# Altium PCB MAIN.PcbDoc
Units mil, origin at the board's own origin, x right, y up, seen from the top; angles counter-clockwise.
Board outline 1965 x 2031 mil, 4 copper layers (SIG1, GND, PWR, SIG2), stack 53.912 mil thick; 19 components, 15 nets, 78 pads, 16 vias.
Unrouted connection lines stored in the file: 1.
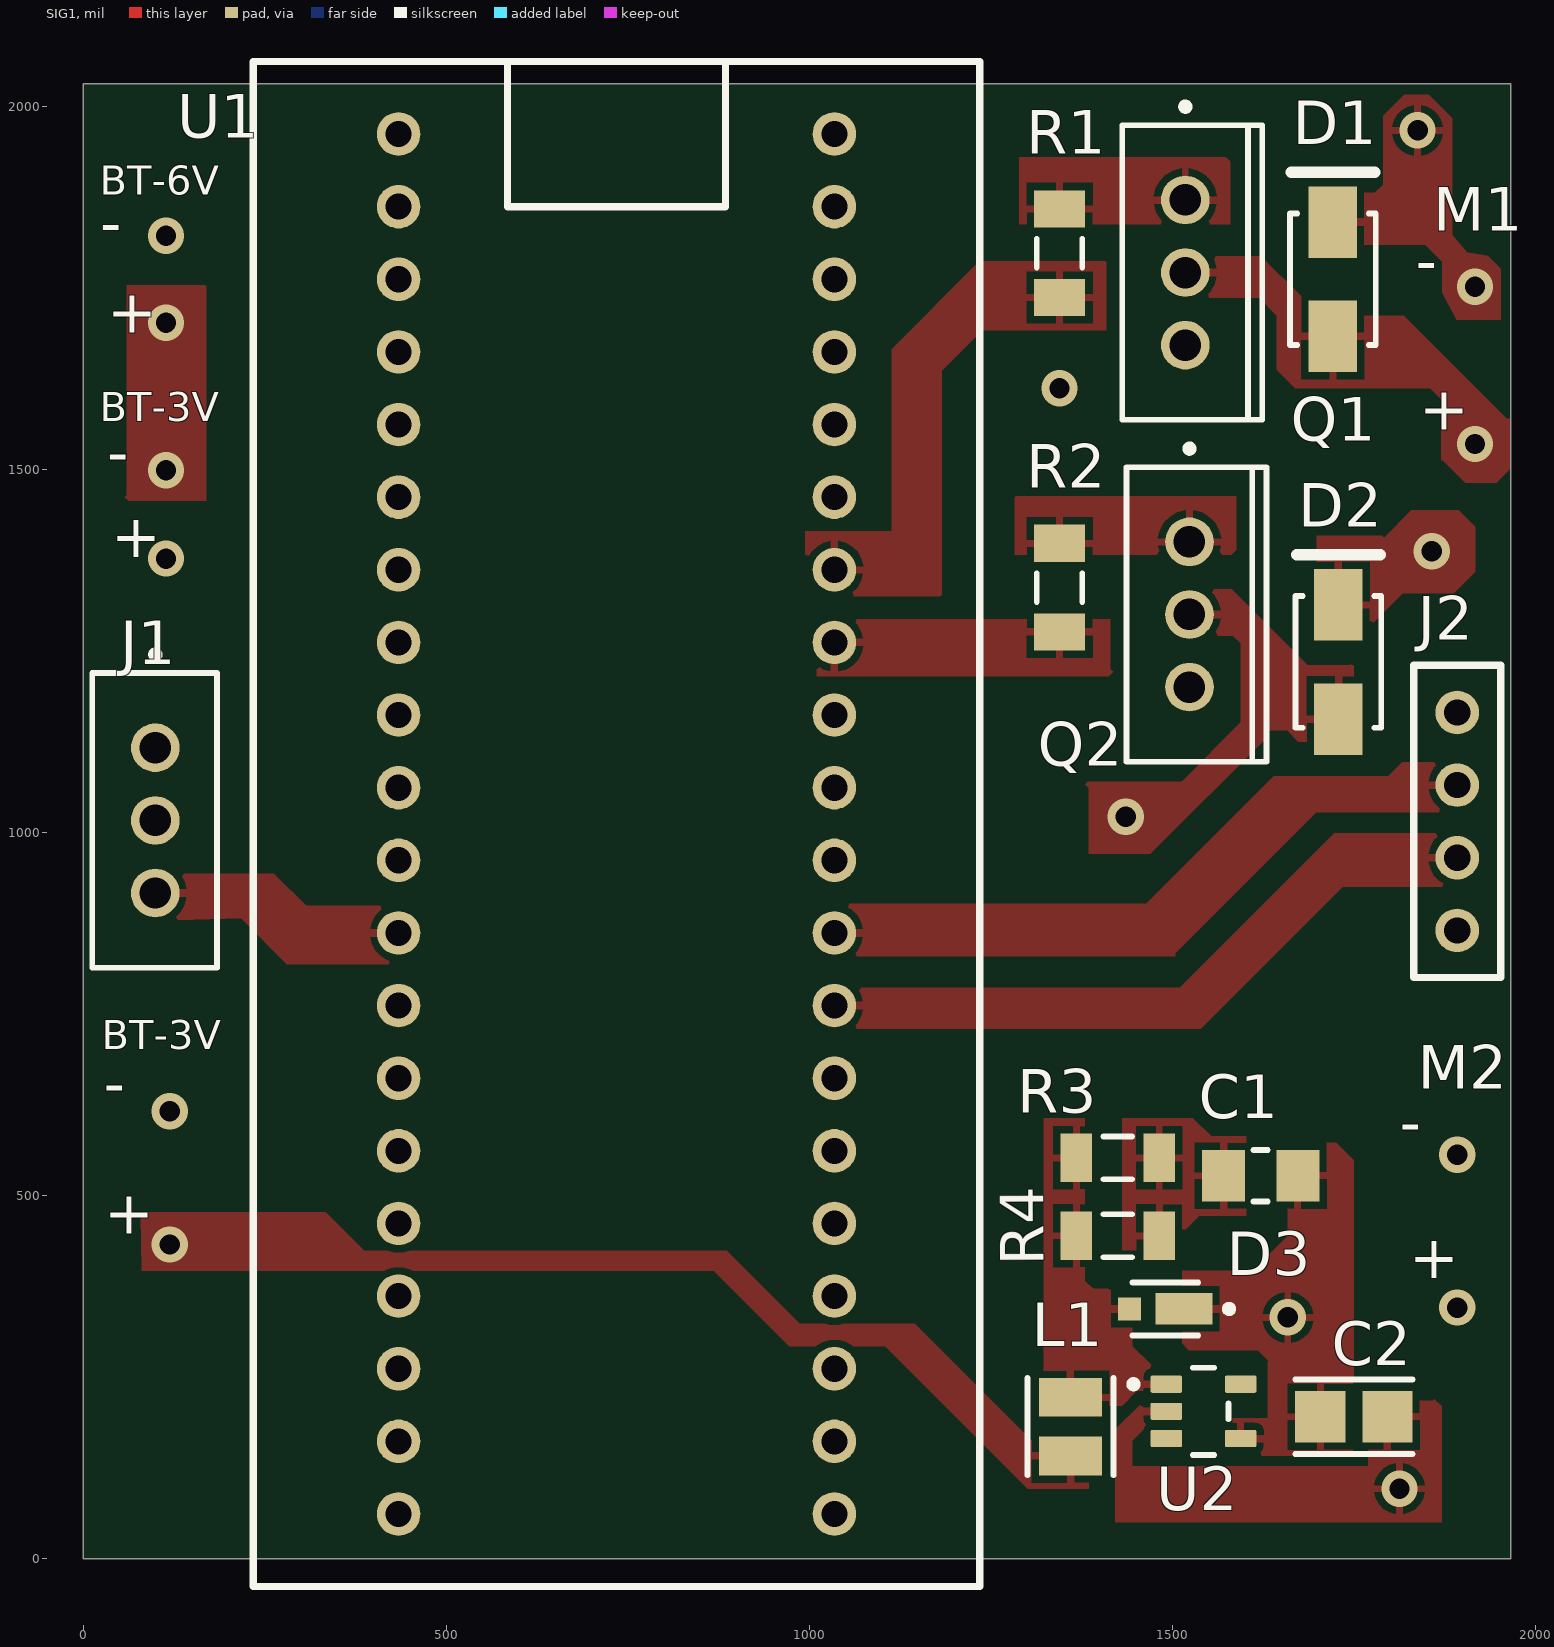
[diagram p0: SIG1 view]
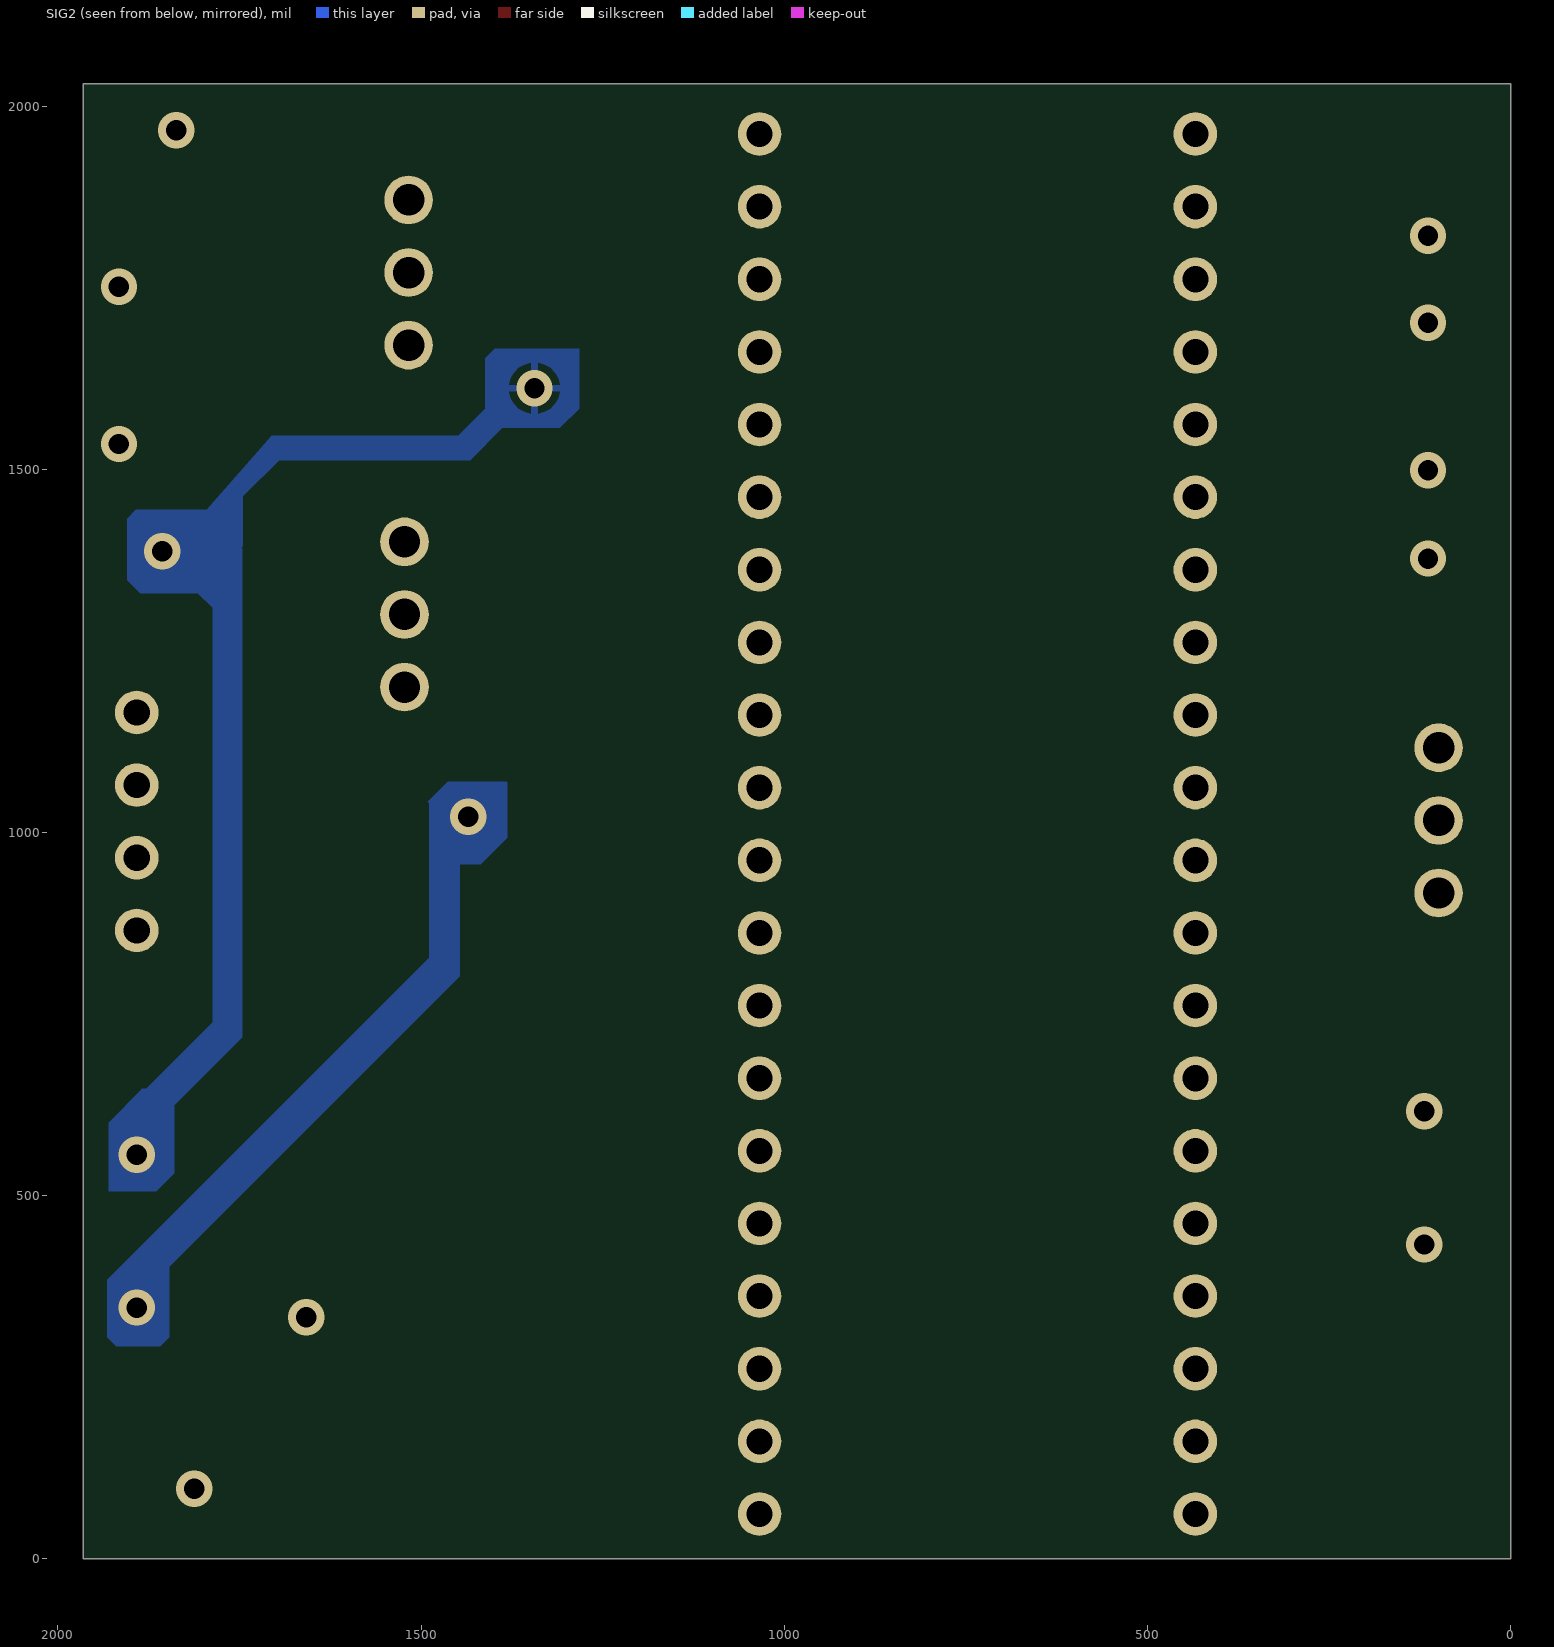
[diagram p1: SIG2 view, seen from below]
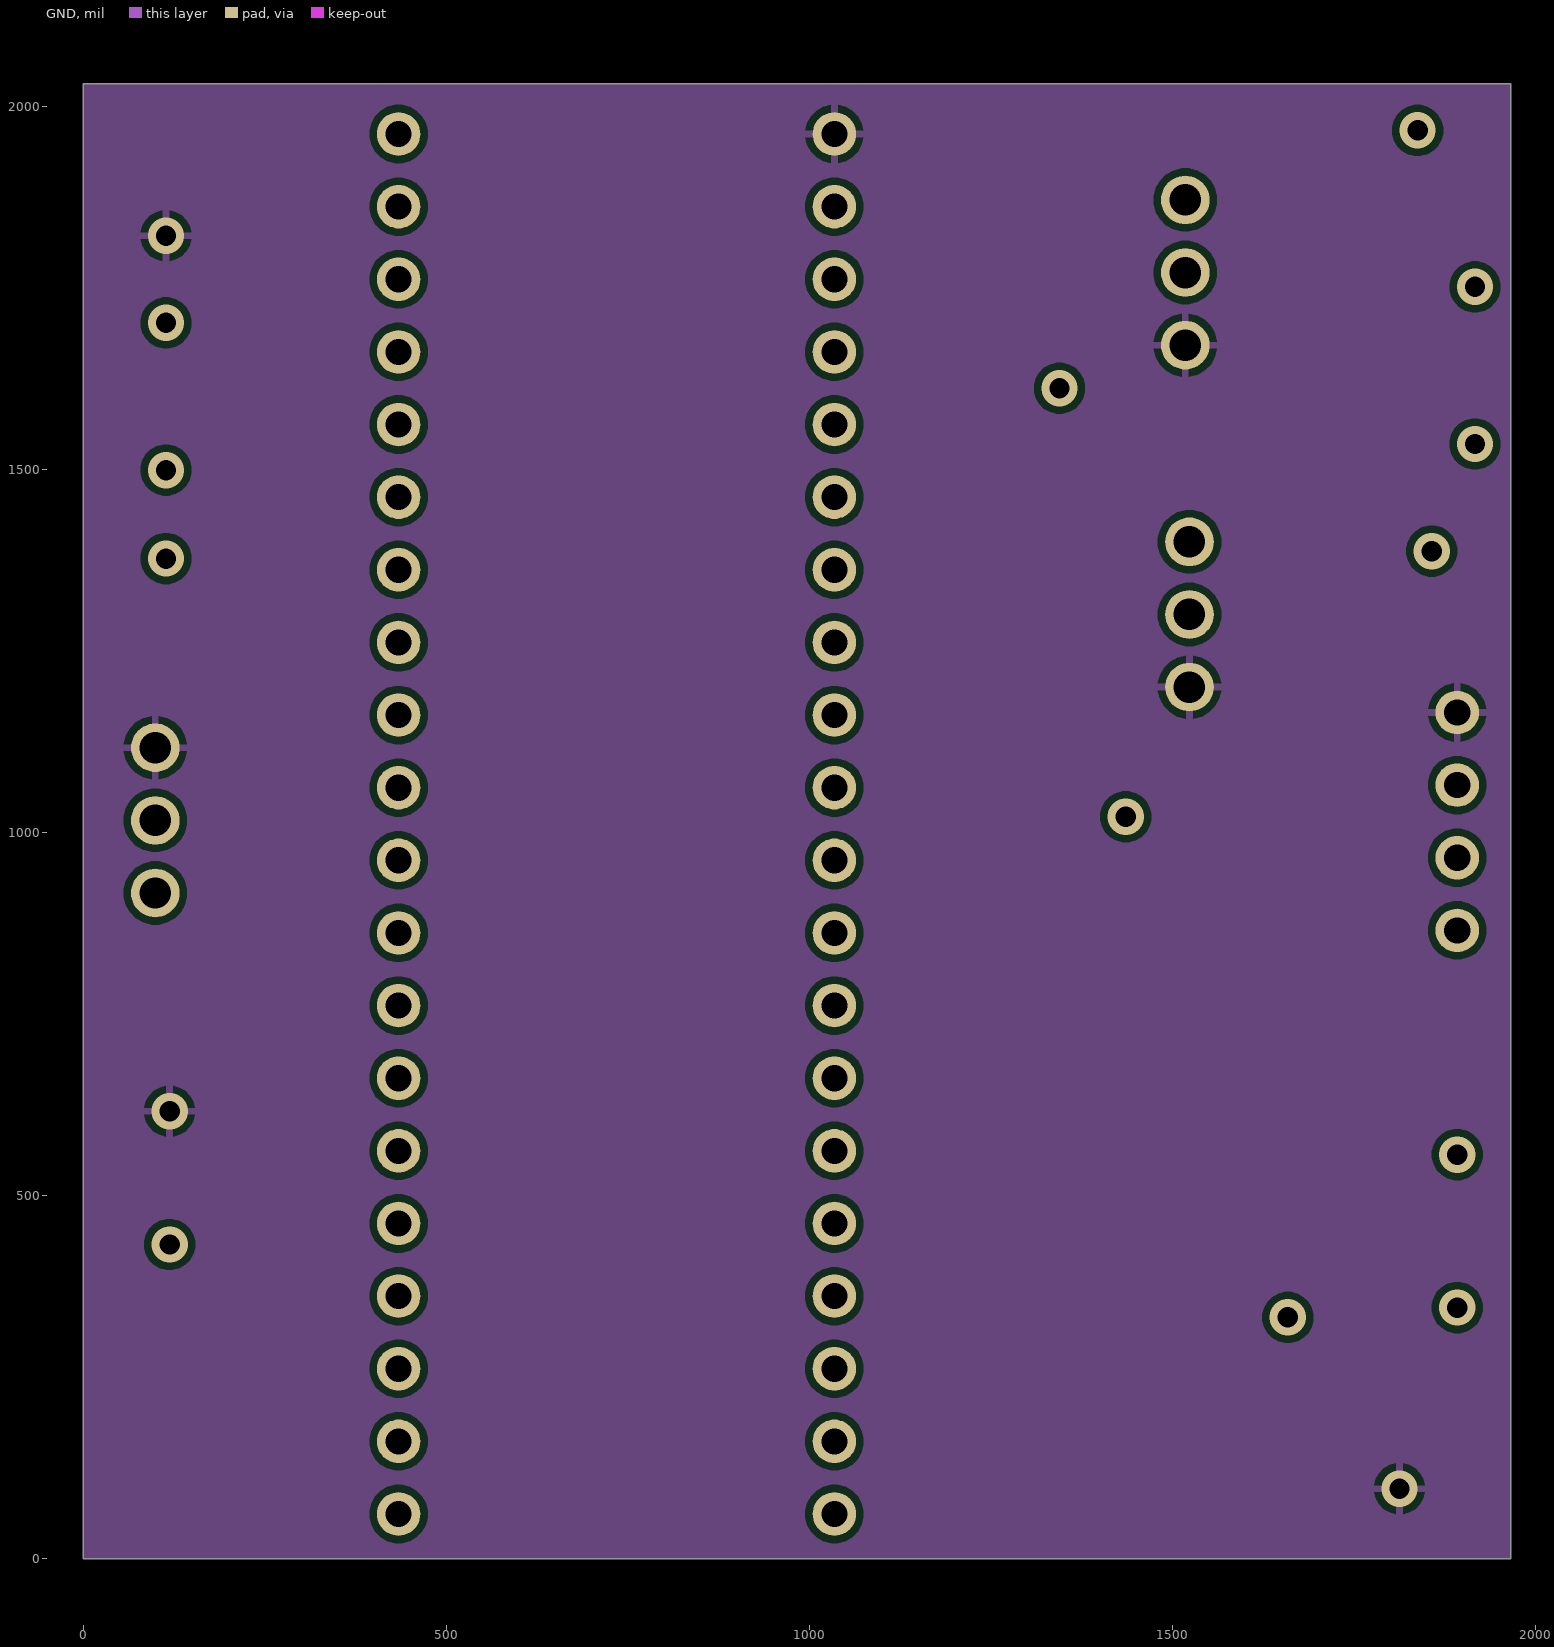
[diagram p2: GND]
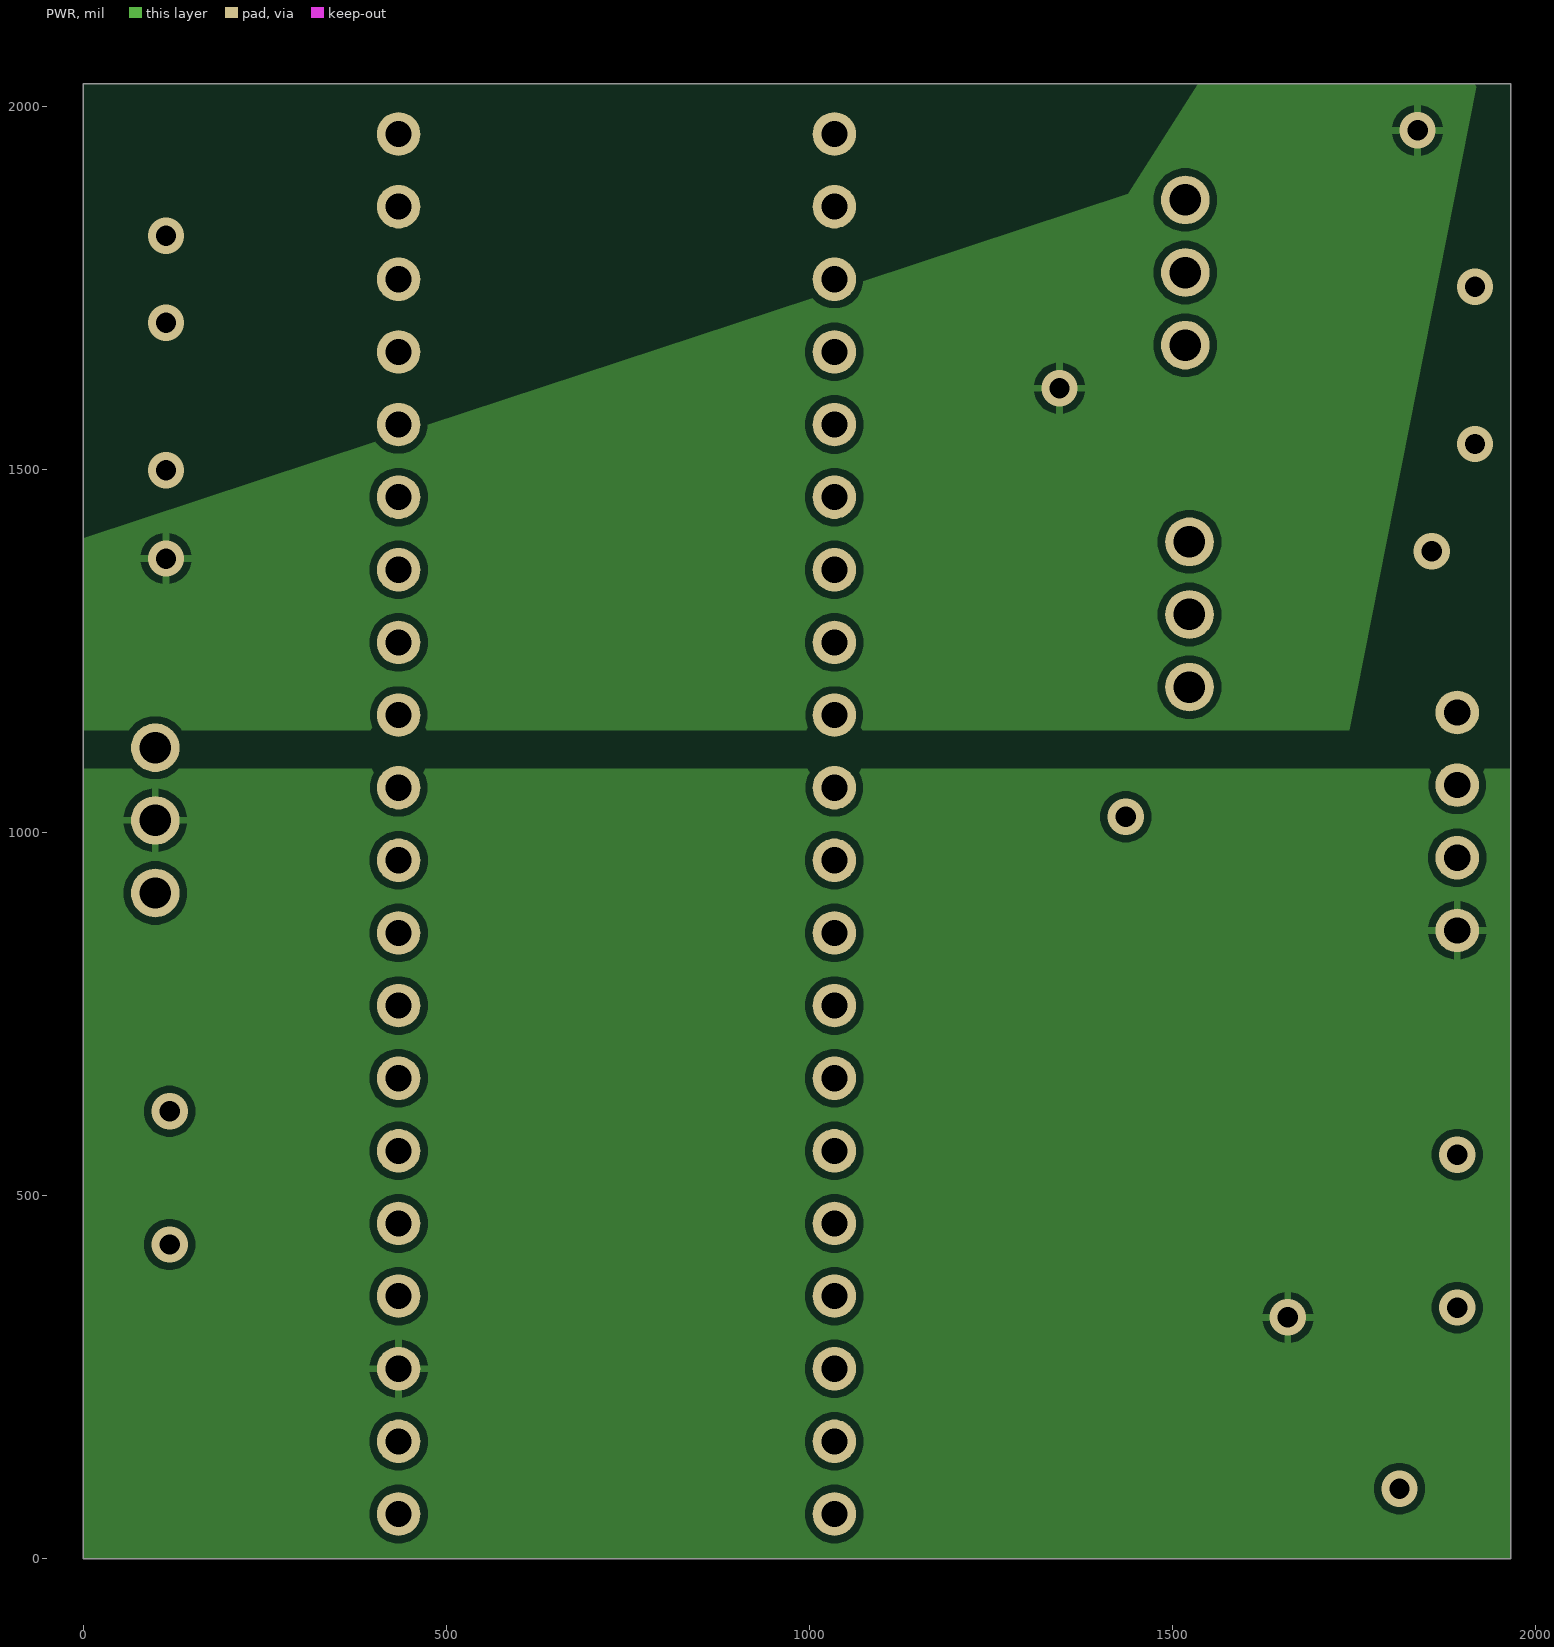
[diagram p3: PWR]

## Layer stack, top to bottom
Top Solder: solder mask 0.5, Solder Resist, Dk 3.3
SIG1: signal copper 1.378
Dielectric 1: prepreg 10.2, PP-006, Dk 4.1
GND: signal copper 1.378
Dielectric1: core 28, FR-4, Dk 4.3
PWR: signal copper 1.378
Dielectric 2: prepreg 10.2, PP-006, Dk 4.1
SIG2: signal copper 1.378
Bottom Solder: solder mask 0.5, Solder Resist, Dk 3.3

## Board outline
0,0 1965,0 1965,2031 0,2031

## Design rules (kind name [scope] priority, off if disabled: settings)
Clearance [All] p1: gap=10 ignorepadtopadclearanceinfootprint=FALSE
DiffPairsRouting [All] p1: maxlimit=10 minlimit=10 mostfreqgap=10 toplayer_minwidth=10 toplayer_maxwidth=10 toplayer_prefwidth=10 midlayer1_minwidth=10 midlayer1_maxwidth=10 midlayer1_prefwidth=10 midlayer2_minwidth=10 midlayer2_maxwidth=10 midlayer2_prefwidth=10 bottomlayer_minwidth=10 bottomlayer_maxwidth=10 bottomlayer_prefwidth=10 maxuncoupledlength=500
HoleSize [All] p1: absolutevalues=TRUE maxlimit=300 minlimit=10 maxpercent=80.000 minpercent=20.000
MinimumAnnularRing [All] p1: minimumring=10
PasteMaskExpansion [All] p1: expansion=10
PlaneClearance [All] p1: clearance=15
PlaneConnect [All] p1: pad.planeconnectstyle=Relief pad.reliefexpansion=20 pad.reliefentries=4 pad.reliefconductorwidth=10 pad.reliefairgap=10 via.planeconnectstyle=Direct via.reliefexpansion=20 via.reliefentries=4 via.reliefconductorwidth=10 via.reliefairgap=10
PolygonConnect [All] p1: thpad.connectstyle=Relief thpad.reliefconductorwidth=10 thpad.reliefentries=4 thpad.polygonreliefangle="90 Angle" thpad.airgapwidth=10 smdpad.connectstyle=Relief smdpad.reliefconductorwidth=10 smdpad.reliefentries=4 smdpad.polygonreliefangle="90 Angle" smdpad.airgapwidth=10 via.connectstyle=Direct via.reliefconductorwidth=10 via.reliefentries=4 via.polygonreliefangle="90 Angle" via.airgapwidth=10
RoutingVias [All] p1: holewidth=10 width=20 viastyle="Through Hole" minholewidth=10 minwidth=20 maxholewidth=10 maxwidth=20
SMDNeckDown [All] p1: percent=100.000
SilkToSolderMaskClearance SilkscreenOverComponentPads [IsPad] p1: minsilkscreentomaskgap=10 clearancetoexposedcopper=TRUE
SolderMaskExpansion [All] p1: expansion=10 istentingtop=FALSE
Width [All] p1: maxlimit=10 minlimit=10 preferedwidth=10
24 further rules are at their usual default settings.

## Components (designator, comment, footprint, x,y, rotation, side; value= is the part's Value field where it differs from the comment)
BT-3V "3V" "New footprint 1" 2088,36 r90 top (schematic designator BT1)
C1 "GRM31A7U3A121JW31D" FP-GRM31A-0_2-e0_3_0_95-IPC_B 1620.91,527.71 r0 top
C2 "C3216X5R1V226M160AC" FP-C3216-160-0_2-IPC_B 1749.2,195.85 r0 top
D1 "S1G-13-F" DIOD-SMA-2_V 1720.41,1762 r90 top
D2 "S1G-13-F" DIOD-SMA-2_V 1727.98,1235.25 r90 top
D3 "MSS1P4-M3/89A" FP-96591-MFG 1489.74,344.27 r180 top value=50pF
J1 "Female 3 Pin Header" "Female 4 Pin Header-Footprint-1"#1 9,812.01 r0 top
J2 "Female 4 Pin Header" "Female 4 Pin Header-Footprint-1"#2 1891.54,1015.5 r0 top
L1 "DFE252012F-2R2M=P2" FP-DFE252012C-IPC_B 1359.22,182.27 r90 top
M1 "9V Motor" "9V Motor-Footprint-1" 2298,36 r90 top
M2 "9V Motor" "9V Motor-Footprint-1" 2448,36 r90 top
Q1 "TIP41CG" ONSC-TO-220-3-221A-09 1517.2,1771.28 r0 top
Q2 "TIP41CG" ONSC-TO-220-3-221A-09 1522.92,1300.49 r0 top
R1 "CRCW1206220RFKEA" RESC3216X60X45ML10T20 1343.98,1797.97 r90 top value="220 Ohm"
R2 "CRCW1206220RFKEA" RESC3216X60X45ML10T20 1343.98,1337.44 r90 top value="220 Ohm"
R3 "CRCW120610R0FKTA" RESC3216X60X45NL10T20 1424.18,552.27 r0 top value=10ohm
R4 "CRCW120610R0FKTA" RESC3216X60X45NL10T20 1424.18,445.09 r0 top value=10ohm
U1 "Blue Pill Breakout Board" "Blue Pill Breakout Board-Footprint-1" 229,-43 r0 top
U2 "TPS613222ADBVT" FP-DBV0005A-MFG 1542.2,203.27 r0 top

## Footprints (in the part's own frame and the unit in brackets; to place one, negate y for a bottom-side part, rotate by r counter-clockwise, add the part's x,y. Pads: shape width x height; smd on the part's side, far side on the other; paste and mask are expansions set on the pad)
"9V Motor-Footprint-1" [mil]
"Blue Pill Breakout Board-Footprint-1" [mil]
  round 60 hole 36 paste+0 mask+2: 1(205,105) 2(205,205) 3(205,305) 4(205,405) 5(205,505) 6(205,605) 7(205,705) 8(205,805) 9(205,905) 10(205,1005) 11(205,1105) 12(205,1205) 13(205,1305) 14(205,1405) 15(205,1505) 16(205,1605) 17(205,1705) 18(205,1805) 19(205,1905) 20(205,2005) 21(805,2005) 22(805,1905) 23(805,1805) 24(805,1705) 25(805,1605) 26(805,1505) 27(805,1405) 28(805,1305) 29(805,1205) 30(805,1105) 31(805,1005) 32(805,905) 33(805,805) 34(805,705) 35(805,605) 36(805,505) 37(805,405) 38(805,305) 39(805,205) 40(805,105)
  silkscreen extent 5,5 1005,2105
DIOD-SMA-2_V [mm] "Molded Diode, 2-Leads, Body 4.6x2.92mm"
  rect 2.5x1.7 smd: 1(-2,0) 2(2,0)
  silkscreen extent -2.3,-1.5 3.75,1.5, body extent -2.52,-1.46 2.52,1.46, height 2.4
"Female 4 Pin Header-Footprint-1"#1 [mm]
  round 1.7 hole 1.1: 1(2.286,7.747) 2(2.286,5.207) 3(2.286,2.667)
  silkscreen extent 0.08,0.06 4.44,11.13, body extent 2.04,2 2.54,8.42, height 2.8
"Female 4 Pin Header-Footprint-1"#2 [mm]
  round 1.524 hole 0.914 paste+0 mask+0.051: 1(0,3.81) 2(0,1.27) 3(0,-1.27) 4(0,-3.81)
  silkscreen extent -1.52,-5.46 1.52,5.46
FP-96591-MFG [mm]
  rect 2x1.1 smd paste+0 mask+0: 1(-0.65,0)
  rect 0.8x0.8 smd paste+0 mask+0: 2(1.25,0)
  silkscreen extent -2.35,-0.92 1.15,0.92, body extent -1.75,-0.8 1.75,0.8, height 0.25
FP-C3216-160-0_2-IPC_B [mil]
  rect 69.05x71.11 smd paste+0 mask+0: 1(-46.3,0) 2(46.3,0)
  silkscreen extent -81,-51 81,51, body extent -91,-45 91,45, height 10
FP-DBV0005A-MFG [mm]
  rrect17% 1.1x0.6 smd paste+0 mask+0: 1(-1.3,0.95) 2(-1.3,0) 3(-1.3,-0.95) 4(1.3,-0.95) 5(1.3,0.95)
  silkscreen extent -2.57,-1.53 0.87,1.53, body extent -1.95,-1.78 1.95,1.78, height 0.25
FP-DFE252012C-IPC_B [mil]
  rect 53.34x86.86 smd paste+0 mask+0: 1(-40.38,0) 2(40.38,0)
  silkscreen extent -67,-59 67,59, body extent -77,-53 77,53, height 10
FP-GRM31A-0_2-e0_3_0_95-IPC_B [mil]
  rect 59.23x71.11 smd paste+0 mask+0: 1(-51.22,0) 2(51.22,0)
  silkscreen extent -10,-36 10,36, body extent -91,-45 91,45, height 10
"New footprint 1" [mil]
ONSC-TO-220-3-221A-09 [mm] "FM, 3-Leads, Body 10.3x4.85mm, Pitch 2.54mm"
  round 1.7 hole 1.1: 1(0,2.54) 2(0,0) 3(0,-2.54)
  silkscreen extent -2.2,-5.15 2.7,5.92, body extent -2.18,-5.15 2.67,5.15, height 19.85
RESC3216X60X45ML10T20 [mm] "Chip Resistor, 2-Leads, Body 3.20x1.60mm, IPC Low Density"
  rect 1.3x1.8 smd: 1(-1.55,0) 2(1.55,0)
  silkscreen extent -0.5,-0.8 0.5,0.8, body extent -1.65,-0.85 1.65,0.85, height 0.6
RESC3216X60X45NL10T20 [mm] "Chip Resistor, 2-Leads, Body 3.20x1.60mm, IPC Medium Density"
  rect 1.1x1.7 smd: 1(-1.45,0) 2(1.45,0)
  silkscreen extent -0.5,-0.75 0.5,0.75, body extent -1.65,-0.85 1.65,0.85, height 0.6

## Part data
BT-3V: library part CMP-00029-00001-1
C1: library part CMP-06035-044906-1, "Chip Multilayer Ceramic Capacitors for General Purpose, 1206, 120pF, U2J, -750ppm/°C, 5%, 1kV", Capacitance=120pF, Case Code (Imperial)=1206, Case Code (Metric)=3216, Dielectric=U2J, Max Operating Temperature=125°C, Min Operating Temperature=-55°C, Package Quantity=4000, Tolerance=5%, Voltage Rating=1kV, Case/Package=1206, Depth=1.6mm, Height=1mm, Length=3.2mm, Mount="Surface Mount", Packaging="Tape and Reel", Radiation Hardening=No, Termination=SMD/SMT, Thickness=0.039inch, Voltage Rating (DC)=1kV, Width=0.063inch
C2: library part CMP-2000-05398-2, "Multilayer Ceramic Capacitors 22uF ±20% 35V X5R SMD 1206", Capacitance=22uF, Case Code (Imperial)=1206, Case Code (Metric)=3216, Dielectric=X5R, Dielectric Material=Ceramic, Max Operating Temperature=85°C, Min Operating Temperature=-55°C, Package Quantity=2000, Tolerance=20%, Voltage=35V, Case/Package=1206, Construction=Flat, Depth=1.6mm, Height=1.6mm, Lead Free="Lead Free", Length=3.2mm, Mount="Surface Mount", Packaging="Tape and Reel", Radiation Hardening=No, REACH SVHC="No SVHC", Resistor Type=Ceramic, RoHS Compliant=Yes, Series=C, Termination=SMD/SMT, Thickness=1.6mm, Voltage Rating=35V, Voltage Rating (DC)=35V, Weight=0.000571oz, Width=0.063inch
D1 D2: library part CMP-2000-07012-1, "Glass Passivated Rectifier, 1 A, 400 V, -65 to 150 degC, 2-Pin SMD, RoHS, Tape and Reel", Average Rectified Current-Max=1A, Forward Voltage=1.1V, Manufacturer="Diodes Inc", Package Description="2-Pin Surface Mounted Assembly, Body 4.3 x 2.605 mm, Height 2.4 mm", Package Reference=SMA-2, Peak Current-Max=30A, Reverse Current-Max=5µA, Reverse Voltage-Max [Vrrm]=400V, Datasheet URL=http://www.diodes.com/_files/datasheets/ds16003.pdf, Datasheet Version="Rev. 24-2, 12/2014", Manufacturer URL=http://www.diodes.com/, Mounting Technology=SurfaceMount
D3: library part CMP-02539-000019-1, "DIODE SCHOTTKY 40V 1A MICROSMP", Capacitance=50pF, Forward Current=1A, Manufacturer=Vishay, Max Junction Temp=+150°C, Max Repetitive Reverse Voltage=40V, Max Surge Forward Current=25A, Package=96591, Peak Reverse Current=8.5uA, Temperature="-55°C to +150°C", Temperature Range Low=-55°C, Automotive=No, Category=Diode, ComponentLink2Description=Datasheet, ComponentLink2URL=http://www.vishay.com/docs/89019/mss1p4.pdf, Device Class L1="Discrete Semiconductors", Device Class L2=Diodes, Device Class L3="Schottky Diodes", Digikey Description="DIODE SCHOTTKY 40V 1A MICROSMP", Footprint Url=http://www.vishay.com/docs/96591/microsmp_do-219ad_fredpt.pdf, Height=0.73mm, Lead Free=Yes, Manufacturer Part Number=MSS1P4-M3/89A, Mouser Description="Schottky Diodes & Rectifiers 1.0 Amp 40 Volt", Octopart=https://octopart.com/mss1p4-m3%2F89a-vishay-42505723, RoHS=TRUE, Temperature Range High=+150°C
J1: library part CMP-002-00071-1, Gender=Female
J2: library part CMP-002-00072-1
L1: library part CMP-06042-014676-1, "Shielded Wirewound Inductor 2.2uH 20% 2300mA 0.082Ω 1008 (2520)", Case Code (Imperial)=1008, Case Code (Metric)=2520, Current Rating=2.3A, DC Resistance (DCR)=82mR, Inductance=2.2uH, Max Operating Temperature=125°C, Min Operating Temperature=-40°C, Saturation Current=3.6A, Test Frequency=1MHz, Tolerance=20%, Case/Package=1008, Core Material=Ferrite, Height - Seated (Max)=0.047inch, Length=0.098inch, Mount="Surface Mount", Packaging="Tape and Reel", Shielding=Shielded, Width=0.079inch
M1 M2: library part CMP-00030-00001-4
Q1 Q2: library part CMP-1048-01176-1, "Complementary Silicon Plastic Power Transistor, 3-Pin TO-220, Pb-Free, Tube", Manufacturer="On Semiconductor", ComponentLink1Description="Manufacturer URL", ComponentLink1URL=http://www.onsemi.com/, ComponentLink2Description=Datasheet, ComponentLink2URL=http://www.onsemi.com/pub_link/Collateral/TIP41A-D.PDF, ComponentLink3Description="Package Specification", ComponentLink3URL=http://www.onsemi.com/pub_link/Collateral/221A-09.PDF, DatasheetVersion="Rev. 10", fT Min (MHz)=3, IC Continuous (A)=6, Mounting Technology="Through Hole", PackageDescription="3-Pin Flange Mount, Vertical Straight Lead, Body 9.97 x 4.445 mm, Pitch 2.54 mm", PackageReference=TO-220-3-221A-09, PackageVersion="Rev. AG, 09/2011", Packing=Tube, PartNumber=TIP41CG, Polarity=NPN, RoHS=TRUE
R1 R2: library part CMP-2003-01956-1, Manufacturer="Vishay Dale", Package=1206, Part Number=CRCW1206220RFKEA
R3 R4: library part CMP-2003-02505-1, Manufacturer="Vishay Dale", Package=1206, Part Number=CRCW120610R0FKTA
U1: library part CMP-020-00023-5, "STM32F103C6T6A", Clock Frequency=72mHz
U2: library part CMP-04918-000400-1, "IC REG BOOST 5V 2.5A SOT23-5", Case/Package=SOT-23-5, Max Input Voltage=5.5V, Max Operating Temperature=85°C, Min Input Voltage=900mV, Min Operating Temperature=-40°C, Min Output Voltage=5V, Output Current=2.5A, Switching Frequency=2MHz, Mount="Surface Mount", Number of Outputs=1, Output Configuration=Positive, Output Type=Fixed, Packaging="Tape and Reel", RoHS Compliant=Yes, Synchronous Rectifier=Yes, Topology=Boost

## Via types
v1: diameter 50, hole 28, SIG1 to SIG2, 16 vias

## Nets (pads, with @x,y where several pads share a name; then routed paths per layer and width w, separated by ;. In a path a pad name is that pad's centre, name@x,y a point inside that pad or via, vN(x,y) a via of type N, cw(c..) or ccw(c..) an arc to the next point about the centre after c; other vN are vias at no path point)
5V: C1.2 C2.1 D3.1 J1.2 J2.4 U1.3 U2.4
  other v1: 1658.37,332.66
9V: D1.2 D2.2
  other v1: 1891.54,556.73 113.68,1377.44 1856.54,1387.72 113.68,1499.27 1343.98,1612 113.68,1702 1916.1,1751.6 1837,1967
GND: C2.2 J1.1 J2.1 Q1.3 Q2.3 U1.21 U2.2
  other v1: 1812.19,96.83 118.68,616.48 113.68,1822
IR_SIG: J1.3 U1.9
M1_PWM: R1.1 U1.27
M2_PWM: R2.1 U1.28
NetBT1_1: L1.1
  other v1: 118.68,433.05
NetC1_1: C1.1 R3.2 R4.2
NetD1_1: D1.1 Q1.2
  other v1: 1916.1,1535.2
NetD2_1: D2.1 Q2.2
  other v1: 1891.54,346.17 1435.21,1022
NetD3_2: D3.2 L1.2 R3.1 R4.1 U2.1
NetQ1_1: Q1.1 R1.2
NetQ2_1: Q2.1 R2.2
US_ECHO: J2.2 U1.32
US_TRIG: J2.3 U1.33
pads on no net: U1.1 U1.2 U1.4 U1.5 U1.6 U1.7 U1.8 U1.10 U1.11 U1.12 U1.13 U1.14 U1.15 U1.16 U1.17 U1.18 U1.19 U1.20 U1.22 U1.23 U1.24 U1.25 U1.26 U1.29 U1.30 U1.31 U1.34 U1.35 U1.36 U1.37 U1.38 U1.39 U1.40 U2.3 U2.5

## Polygon pours and split planes (outlines as drawn)
9V on PWR "9V_L03_P001" (solid, pour order 1): 1438.95,1879.57 1535.24,2031 1688.59,2031 1918.63,2031 1742.82,1141 0,1141 0,1405.74
5V on PWR "5V_L03_P002" (solid, pour order 2): 0,1087.89 1965,1087.89 1965,0 0,0 0,1061.03
9V on SIG1 "9V_L01_P026" (solid, pour order 26): 59.59,1688.59 60,1689 60,1754 166.27,1754 169,1756.73 169,1456.73 62.36,1456.73 57.09,1462 59.59,1464.5
no net on SIG1 "NONET_L01_P025" (solid, pour order 25): 98.15,406 98.1,405.95
NetBT1_1 on SIG1 "NETBT1_1_L01_P024" (solid, pour order 24): 80.02,396.77 78.62,477.44 333.59,477.44 386.35,424.67 885.77,424.67 986.49,323.95 1144.59,323.95 1305.9,162.64 1305.9,160.81 1378.56,160.81 1384.39,154.99 1384.39,96.77 1300.56,96.77 1104.12,293.21 971.68,293.21 868.12,396.77 363.14,396.77
NetD1_1 on SIG1 "NETD1_1_L01_P023" (solid, pour order 23): 1482.42,1744.6 1482.42,1797.97 1486.38,1794.01 1621.27,1794.01 1702.38,1712.9 1702.38,1711.79 1817.73,1711.79 1959.83,1569.68 1965,1569.68 1965,1501.57 1945.37,1481.94 1902.59,1481.94 1871.45,1513.09 1869.61,1513.09 1869.61,1596.66 1854.27,1612 1668.39,1612 1643.28,1637.11 1643.28,1712.04 1618.82,1736.5 1490.51,1736.5
9V on SIG1 "9V_L01_P022" (solid, pour order 22): 1702.77,1877.44 1706.19,1880.85 1777.95,1880.85 1789.48,1892.38 1789.48,1987.22 1818.59,2016.34 1852.09,2016.34 1884.55,1983.88 1884.55,1823.06 1904.73,1799.27 1933.61,1794.22 1951.54,1776.28 1951.54,1706.06 1891.07,1706.06 1870.83,1743.19 1870.83,1786.15 1847.23,1809.75 1700.19,1809.75 1700.19,1878.11 1697.44,1880.85 1749.2,1880.85
9V on SIG1 "9V_L01_P017" (solid, pour order 17): 1702.38,1343.95 1698,1348.33 1698,1409.21 1787.98,1409.21 1790.98,1406.21 1791.01,1406.21 1828.54,1443.74 1893.37,1443.74 1916.1,1421 1916.1,1359.11 1886.98,1329.99 1816.69,1329.99 1816.69,1329.77 1773.47,1286.56 1698,1286.56 1698,1367.14
NetD2_1 on SIG1 "NETD2_1_L01_P016" (solid, pour order 16): 1496.23,1335.27 1581,1335.27 1685.77,1230.5 1742.92,1230.5 1747.67,1235.25 1749.2,1233.72 1749.2,1125.5 1672.98,1125.5 1657.54,1140.94 1629.02,1140.94 1629.02,1130.6 1469.19,970.77 1384.44,970.77 1384.44,1061.73 1378.91,1067.27 1382.14,1070.5 1511.98,1070.5 1593.38,1151.9 1593.38,1260.62 1582.58,1271.42 1499.9,1271.42 1496.23,1275.08
IR_SIG on SIG1 "IR_SIG_L01_P015" (solid, pour order 15): 64.22,943.7 262.3,943.7 306.73,899.27 449.44,899.27 449.44,824.73 443.71,819 280.23,819 217,882.23 64.22,877.44
US_TRIG on SIG1 "US_TRIG_L01_P012" (solid, pour order 12): 1013.77,786.56 1509.57,786.56 1722.28,999.27 1890.58,999.27 1896.81,1005.5 1896.81,925.5 1733.92,925.5 1538.42,730 1023.83,730 1018.56,724.73 1013.77,729.52
US_ECHO on SIG1 "US_ECHO_L01_P011" (solid, pour order 11): 1001.99,917.01 1001.99,837.44 1009.44,829.99 1503.24,829.99 1503.24,834.02 1697.44,1028.23 1906.98,1028.23 1906.98,1097.06 1815.99,1097.06 1796.37,1077.44 1638.93,1077.44 1463.49,902 998.09,902
M2_PWM on SIG1 "M2_PWM_L01_P010" (solid, pour order 10): 1009.44,1215.57 1009.44,1279.11 1001.99,1286.56 1009.44,1294.01 1414.13,1294.01 1414.13,1225.24 1417.64,1221.73 1411.47,1215.57
NetQ2_1 on SIG1 "NETQ2_1_L01_P009" (solid, pour order 9): 1282.42,1382.72 1580.72,1382.72 1588,1390 1587,1391 1587,1463 1283.42,1463 1282.42,1462 1282.42,1402
NetC1_1 on SIG1 "NETC1_1_L01_P005" (solid, pour order 5): 1430.45,607 1527.44,607 1552.64,581.79 1601.23,581.79 1601.23,472.27 1536.2,472.27 1517.88,453.95 1512.77,453.95 1512.77,425.41 1430.45,425.41
NetD3_2 on SIG1 "NETD3_2_L01_P006" (solid, pour order 6): 1322.27,607 1378.68,607 1378.68,383.35 1390.2,371.83 1444.46,371.83 1444.46,293.27 1474.42,263.31 1520.4,263.31 1520.4,231.48 1450.67,231.48 1430.45,211.27 1322.27,211.27 1322.27,454.05
GND on SIG1 "GND_L01_P007" (solid, pour order 7): 1420.84,50.27 1420.84,178.35 1462.75,220.27 1507.75,220.27 1507.75,183.58 1465.43,183.58 1465.43,183.55 1444.46,162.58 1444.46,127.71 1768.89,127.71 1768.89,217.65 1857.58,217.65 1860.2,220.27 1870.18,210.28 1870.18,50.27
5V on SIG1 "5V_L01_P008" (solid, pour order 8): 1582.25,141.89 1746.54,141.89 1749.2,144.55 1749.2,548.93 1725.03,573.1 1658.53,573.1 1658.53,445.09 1610.26,396.83 1512.77,396.83 1512.77,296.83 1521.89,287.71 1616.79,287.71 1632.23,272.27 1630.71,270.75 1630.71,193.46 1582.25,193.46 1582.25,144.55
NetQ1_1 on SIG1 "NETQ1_1_L01_P004" (solid, pour order 4): 1288.87,1837.44 1578.83,1837.44 1578.83,1924.27 1573.1,1929.99 1288.87,1929.99 1288.87,1846.56
M1_PWM on SIG1 "M1_PWM_L01_P003" (solid, pour order 3): 994,1415 994,1325.8 1179.98,1325.8 1182,1327.82 1182,1636.06 1237.94,1692 1408,1692 1408,1785.56 1409,1786.56 1233.56,1786.56 1113,1666 1113,1415 994,1415
9V on SIG2 "9V_L04_P021" (solid, pour order 21): 1282.42,1583.99 1282.42,1666.28 1398.31,1666.28 1411.47,1653.12 1411.47,1583.99 1448.9,1546.56 1705.45,1546.56 1795.08,1444.49 1892.62,1444.49 1904.73,1432.37 1904.73,1347.74 1886.98,1329.99 1807.48,1329.99 1787.04,1309.55 1787.04,738.85 1878.44,647.45 1884.55,647.45 1884.55,646.69 1930.4,600.84 1930.4,506.44 1864.75,506.44 1840.03,531.16 1840.03,624.73 1746.54,718.22 1746.54,1391.19 1747.67,1392.33 1745.29,1394.7 1745.29,1463.31 1695.52,1513.09 1432.58,1513.09 1388.34,1557.32 1309.09,1557.32
NetD2_1 on SIG2 "NETD2_1_L04_P019" (solid, pour order 19): 1462.31,1070.5 1462.57,1070.77 1491.02,1042.32 1489.15,1040.45 1489.15,827.53 1932.37,384.31 1932.37,305.37 1920,293 1859.21,293 1847.09,305.12 1847.09,402.41 1447.06,802.44 1447.06,956.73 1417.77,956.73 1381.67,992.83 1381.67,1069.43 1382.75,1070.5
GND on GND "GND_L02_P000" (solid, pour order 0): 0,2031 1965,2031 1965,0 0,0

## Silkscreen, mask and mechanical layers (free items; w line width, h text height)
Top Overlay:
  text "BT-6V" at 22.19,1878.73 h40
  text "-" at 23.17,1810 h60
  text "-" at 1834.21,1757.74 h60
  text "+" at 32.83,1688.59 h60
  text "BT-3V" at 22.19,1566.73 h40
  text "+" at 1839.42,1555.03 h60
  text "-" at 33.17,1494.56 h60
  text "+" at 38.11,1379.59 h60
  text "-" at 27.85,625.57 h60
  text "-" at 1812.21,571.74 h60
  text "+" at 28.74,448.14 h60
  text "+" at 1825.36,386.56 h60